# EAGLE board PCB_start v41 (EAGLE 9.7.0)
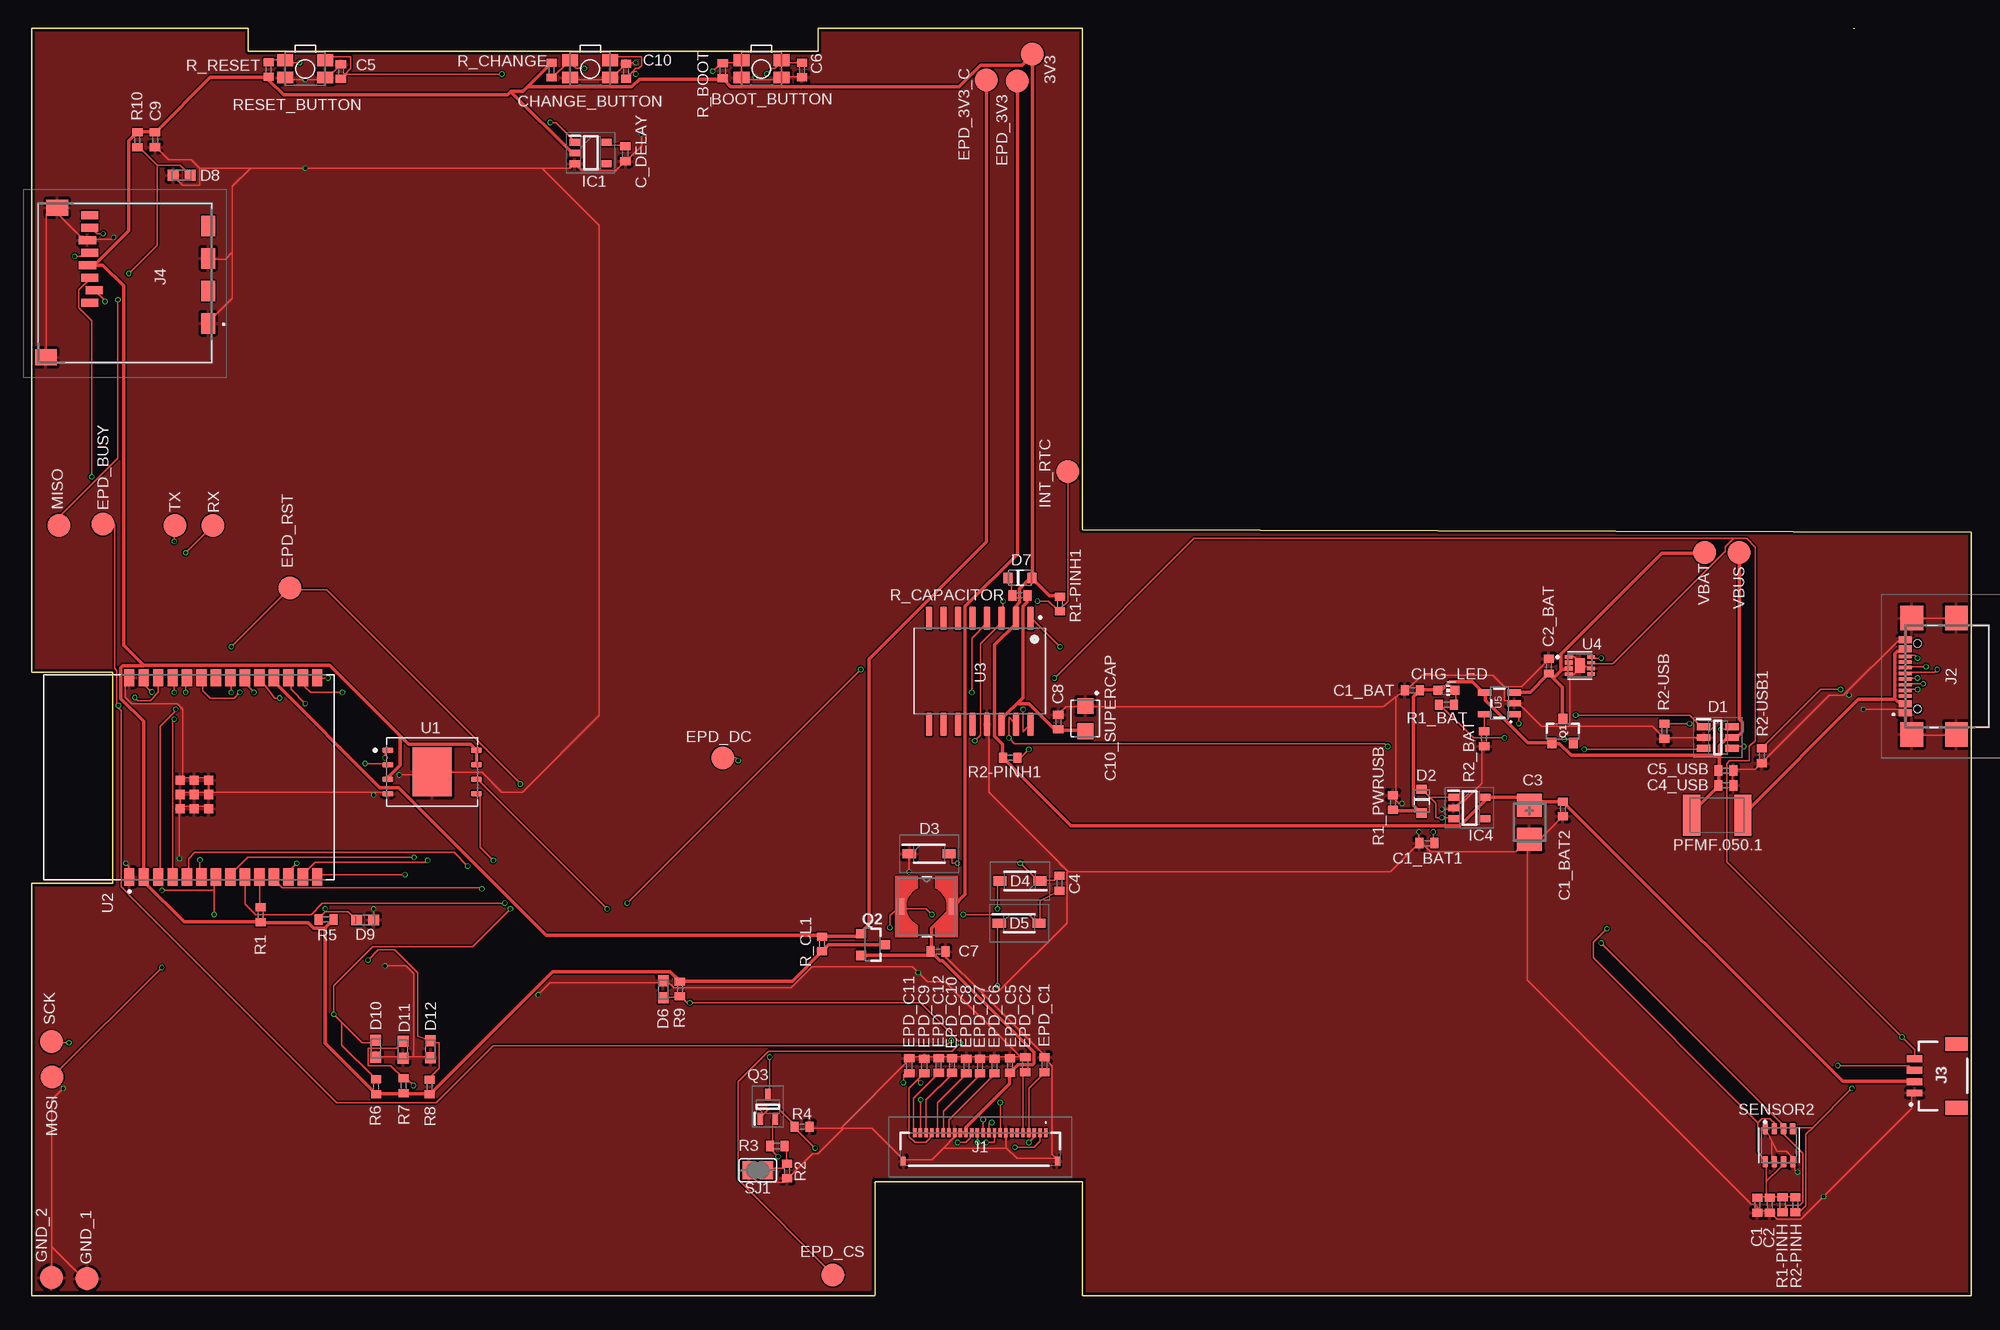
[diagram p0: board, top side]
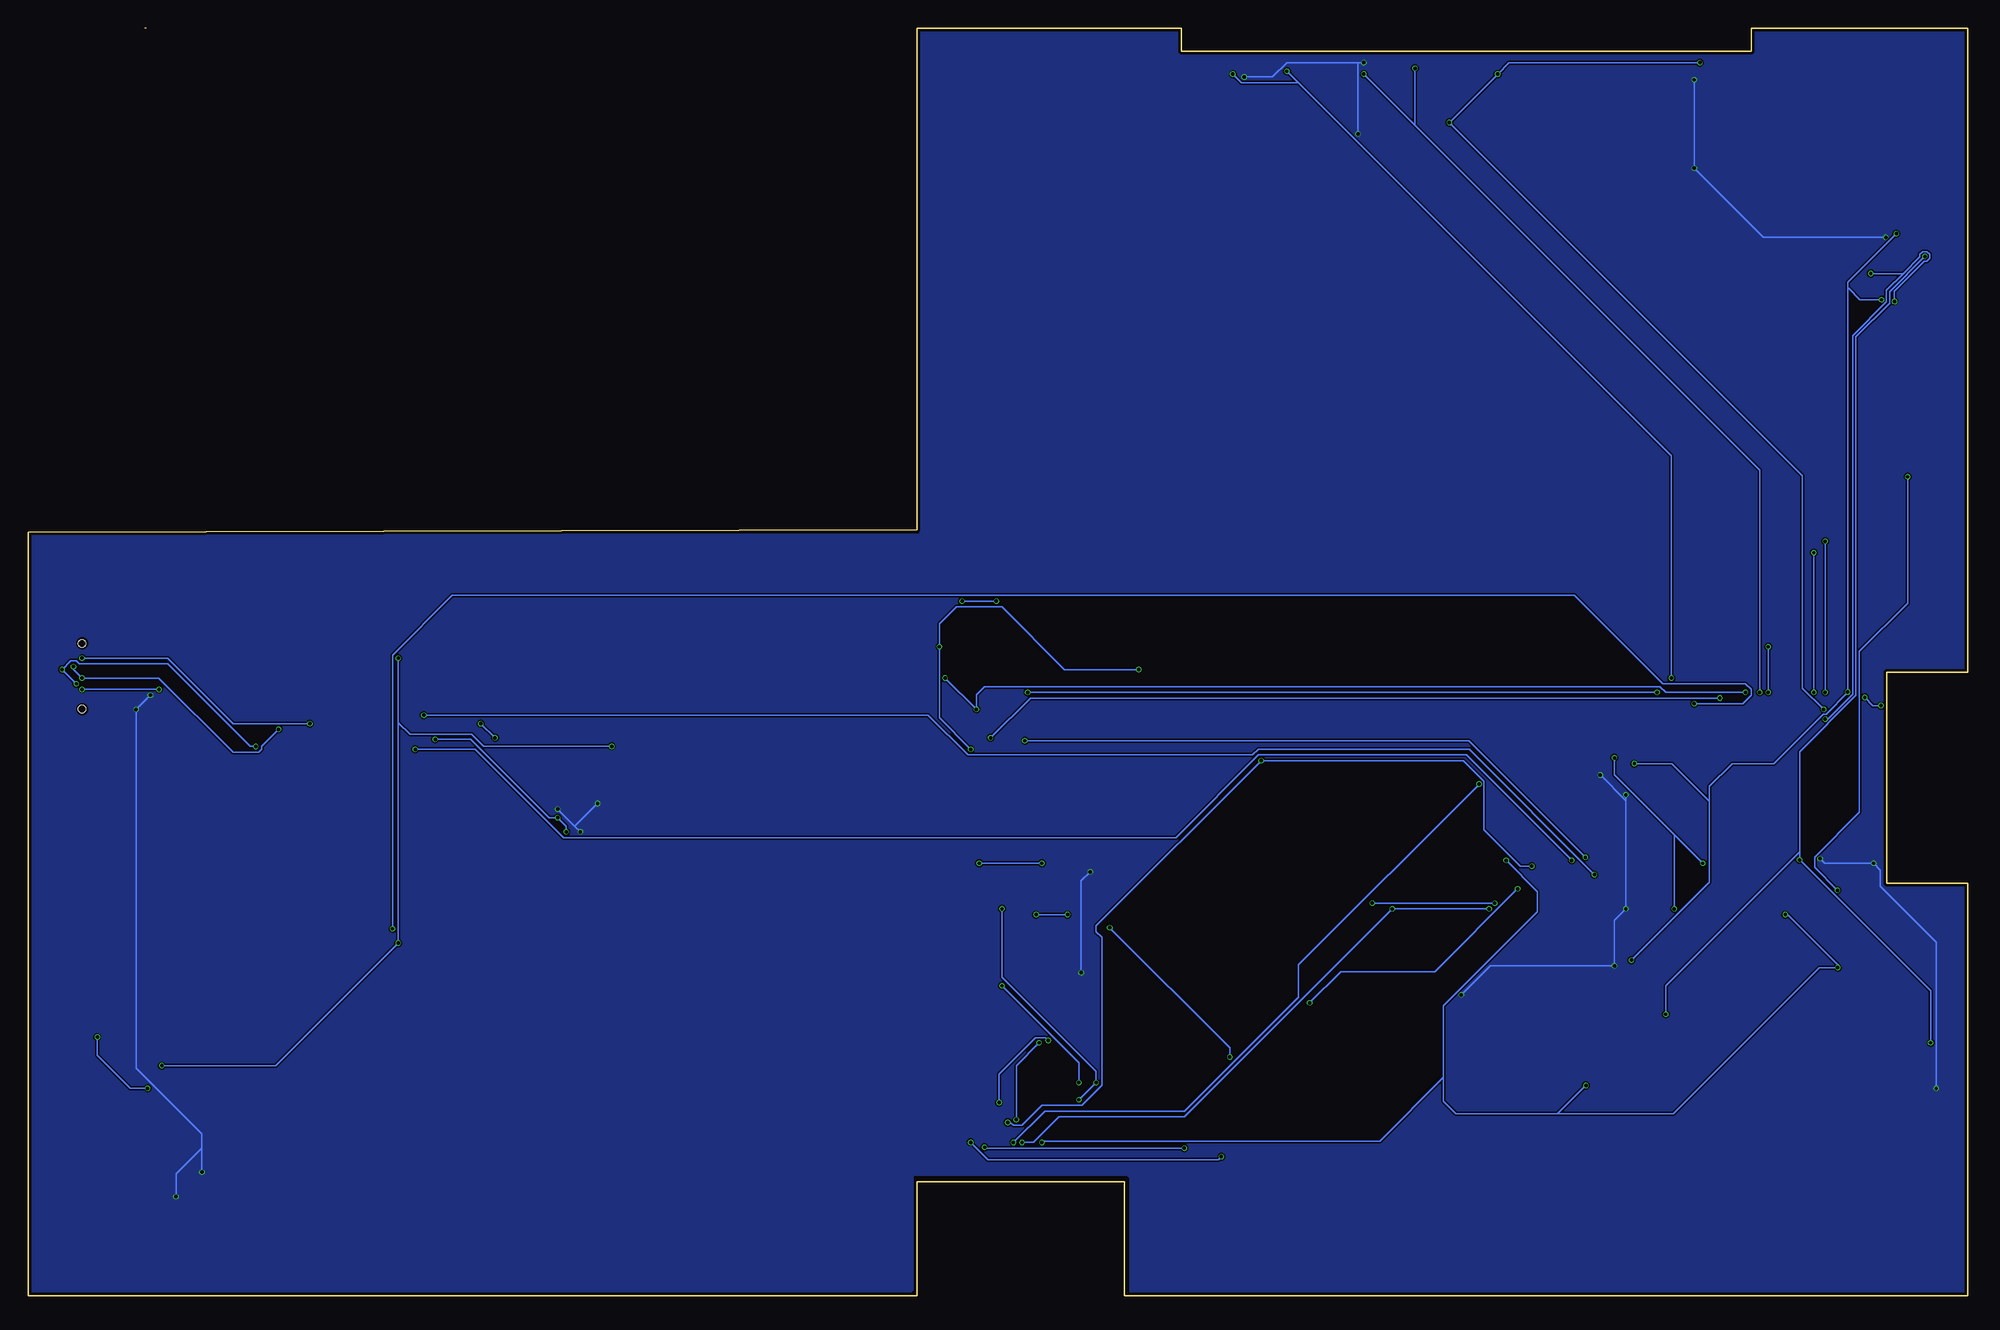
[diagram p1: board, bottom side, seen from below]

Size 170.2 x 111.2 mm. Coordinates in mm from the lower left corner, seen from the top.
Outline: 159.85,111.2 160,111.2
Outline: 170.2,0 92.2,0 92.2,10 74,10 74,0 0,0 0,36.2 7.1,36.2 7.1,49.14 7.1,54.7 0,54.7 0,111.2 19,111.2 19,109.2 69,109.2 69,111.2 92.2,111.2 92.2,67.2 170.2,67 170.2,0
Copper layers (1*16): Top 0.035mm / dielectric 1.6mm / Bottom 0.035mm
Design rules "jlcpcb-2layers.dru": minimum track width 0.15mm, minimum drill 0.3mm, track to track 5mil, track to pad 5mil, pad to pad 5mil, via to via 5mil, smd to smd 5mil, copper to edge 0.2mm, drill to drill 6mil, minimum pad ring 10mil, minimum via ring 3mil, stop-mask expansion 4mil, vias tented up to drill 0mil, thermal gap 10mil
Net classes: 1 POWER: width 0.3 mm

## Footprints (pad centres in the part's own frame; a part is rotated, then mirrored left to right if it is on the bottom)
TP20R = smd 2 x 2: TP 0,0
MYBUTTON = smd 1.4 x 1.05: 1 1.75,0.75; 2 -1.75,0.75; 3 -1.75,-0.75; 4 1.75,-0.75
ESP32_WROVER_EAGLE-LTSPICE_C0402 = smd 0.7 x 0.9: 1 -0.65,0; 2 0.65,0
EAGLE-LTSPICE_C0402 = smd 0.7 x 0.9: 1 -0.65,0; 2 0.65,0
RCL_CT3528 = smd 2 x 2.2: + -1.5,0; - 1.5,0
CAPCP3225X100N = smd 1.4 x 1.4: 1 -1.1,0; 2 1.1,0
ADAFRUIT_CHIP-LED0603 = smd 0.8 x 0.8: A 0,-0.75; C 0,0.75
SOT95P280X145-6N = smd 1.2 x 0.6: 1 -1.25,0.95; 2 -1.25,0; 3 -1.25,-0.95; 4 1.25,-0.95; 5 1.25,0; 6 1.25,0.95
ESP32_WROVER_AVX---SD0805S020S1R0_AVX_SD0805S020S1R0_0 = smd 0.8 x 0.9: 1 -1.05,0; 2 1.05,0
SOD3716X135N = smd 1.15 x 0.8: 1 -1.75,0; 2 1.75,0
DIOC1608X36N = smd 0.97 x 0.94: 1 -0.75,0; 2 0.75,0
SOT95P280X125-5N = smd 0.9 x 0.6: 1 -1.4,0.95; 2 -1.4,0; 3 -1.4,-0.95; 4 1.4,-0.95; 5 1.4,0.95
SOT95P280X120-5N = smd 0.9 x 0.6: 1 -1.4,0.95; 2 -1.4,0; 3 -1.4,-0.95; 4 1.4,-0.95; 5 1.4,0.95
FH34SRJ24S05SH99 = smd 0.3 x 0.8: 1 5.75,1.45; 2 5.25,1.45; 3 4.75,1.45; 4 4.25,1.45; 5 3.75,1.45; 6 3.25,1.45; 7 2.75,1.45; 8 2.25,1.45; 9 1.75,1.45; 10 1.25,1.45; 11 0.75,1.45; 12 0.25,1.45; 13 -0.25,1.45; 14 -0.75,1.45; 15 -1.25,1.45; 16 -1.75,1.45; 17 -2.25,1.45; 18 -2.75,1.45; 19 -3.25,1.45; 20 -3.75,1.45; 21 -4.25,1.45; 22 -4.75,1.45; 23 -5.25,1.45; 24 -5.75,1.45 | smd 0.4 x 0.8: MP1 6.75,-1.05; MP2 -6.75,-1.05
SAMACSYS_PARTS_USB4110GFA = smd 0.3 x 1.15: A1 -3.35,3.678; A4 -2.55,3.678; A5 -1.25,3.678; A6 -0.25,3.678; A7 0.25,3.678; A8 1.25,3.678; A9 2.55,3.678; A12 3.35,3.678; B1 3.05,3.678; B4 2.25,3.678; B5 1.75,3.678; B6 0.75,3.678; B7 -0.75,3.678; B8 -1.75,3.678; B9 -2.25,3.678; B12 -3.05,3.678 | smd 2.18 x 2: MP1 -5.11,-0.827; MP2 5.11,-0.827; MP3 -5.11,3.103; MP4 5.11,3.103 | hole 0.65: -2.89,2.603; 2.89,2.603
JST04_1MM_RA = smd 0.6 x 1.35: 1 -1.5,0; 2 -0.5,0; 3 0.5,0; 4 1.5,0 | smd 1.2 x 2: NC1 2.8,-3.675; NC2 -2.8,-3.675
112ATAARR03ATTEND = smd 1.8 x 1.2: G1 10.6,10.4; G2 4.9,10.4; S1 7.75,10.4; S2 2.05,10.4 | smd 1.4 x 1.9: G3 13.6,-3.85; G4 0.45,-2.85 | smd 0.7 x 1.5: P1 8.8,0; P2 7.7,0.4; P3 6.6,0; P4 5.5,-0.2; P5 4.4,0; P6 3.3,-0.2; P7 2.2,0; P8 1.1,0
IND_4828-WE-TPC_WRE = smd 0.711 x 1.422: 1 -2.286,0; 2 2.286,0
ESP32C6_VARISTOR_CT/CN1812 = smd 1.5 x 3.6: 1 -2.25,0; 2 2.25,0
ESP32_WROVER_SPARKFUN-DISCRETESEMI_SOT23-3 = smd 0.8 x 0.9: 1 -0.95,-1; 2 0.95,-1; 3 0,1.1
SOT65P210X110-3N = smd 1.05 x 0.5: 1 -1.05,0.65; 2 -1.05,-0.65; 3 1.05,0
ESP32_WROVER_EAGLE-LTSPICE_R0402 = smd 0.7 x 0.9: 1 -0.65,0; 2 0.65,0
ESP32_WROVER_BME680_PSON80P300X300X100-8N = smd 1.016 x 0.5: 1 1.458,1.2; 2 1.458,0.4; 3 1.458,-0.4; 4 1.458,-1.2; 5 -1.458,-1.22; 6 -1.458,-0.4; 7 -1.458,0.4; 8 -1.458,1.2
SJ = smd 1.168 x 1.6: 1 -0.762,0; 2 0.762,0
SON127P600X800X80-9N = smd 0.94 x 0.44: 1 -3.895,1.905; 2 -3.895,0.635; 3 -3.895,-0.635; 4 -3.895,-1.905; 5 3.895,-1.905; 6 3.895,-0.635; 7 3.895,0.635; 8 3.895,1.905 | smd 3.4 x 4.3: 9 0,0
XCVR_ESP32-C6-WROOM-1-N8 = smd 1.5 x 0.9: 1 -8.75,5.26; 2 -8.75,3.99; 3 -8.75,2.72; 4 -8.75,1.45; 5 -8.75,0.18; 6 -8.75,-1.09; 7 -8.75,-2.36; 8 -8.75,-3.63; 9 -8.75,-4.9; 10 -8.75,-6.17; 11 -8.75,-7.44; 12 -8.75,-8.71; 13 -8.75,-9.98; 14 -8.75,-11.25; 15 8.75,-11.25; 16 8.75,-9.98; 17 8.75,-8.71; 18 8.75,-7.44; 19 8.75,-6.17; 20 8.75,-4.9; 21 8.75,-3.63; 22 8.75,-2.36; 23 8.75,-1.09; 24 8.75,0.18; 25 8.75,1.45; 26 8.75,2.72; 27 8.75,3.99; 28 8.75,5.26 | smd 0.8 x 0.8: 29_1 -2.755,0.79; 29_2 -1.505,0.79; 29_3 -0.255,0.79; 29_4 -2.755,-0.46; 29_5 -1.505,-0.46; 29_6 -0.255,-0.46; 29_7 -2.755,-1.71; 29_8 -1.505,-1.71; 29_9 -0.255,-1.71
SOIC127P1032X265-16N = smd 2.05 x 0.59: 1 -4.655,4.445; 2 -4.655,3.175; 3 -4.655,1.905; 4 -4.655,0.635; 5 -4.655,-0.635; 6 -4.655,-1.905; 7 -4.655,-3.175; 8 -4.655,-4.445; 9 4.655,-4.445; 10 4.655,-3.175; 11 4.655,-1.905; 12 4.655,-0.635; 13 4.655,0.635; 14 4.655,1.905; 15 4.655,3.175; 16 4.655,4.445
SON50P200X200X80-9N = smd 0.76 x 0.27: 1 -0.985,0.75; 4 -0.985,-0.75; 5 0.985,-0.75; 6 0.985,-0.25; 7 0.985,0.25; 8 0.985,0.75 | smd 0.813 x 0.406: 2 -0.985,0.25; 3 -0.985,-0.25 | smd 0.9 x 1.3: 9 0,0
ESP32_WROVER_SPARKFUN-IC-POWER_SOT23-5 = smd 0.55 x 1.2: 1 -0.95,-1.3; 2 0,-1.3; 3 0.95,-1.3; 4 0.95,1.3; 5 -0.95,1.3

## Placement (x,y rotation side)
3V3  TPTP20R  [TP20R]  87.82,108.95 270 top
BOOT_BUTTON  BUTTON_CUSYOMV1"  [MYBUTTON]  64.03,107.65 180 top
C1  100nF  [ESP32_WROVER_EAGLE-LTSPICE_C0402]  151.45,7.94 270 top
C1_BAT  4.7uF  [ESP32_WROVER_EAGLE-LTSPICE_C0402]  121.16,53.14 180 top
C1_BAT1  4.7uF  [EAGLE-LTSPICE_C0402]  122.45,39.72 180 top
C1_BAT2  4.7uF  [EAGLE-LTSPICE_C0402]  134.38,42.71 270 top
C2  100nF  [ESP32_WROVER_EAGLE-LTSPICE_C0402]  152.53,7.94 270 top
C2_BAT  4.7uF  [ESP32_WROVER_EAGLE-LTSPICE_C0402]  133.14,55.25 90 top
C3  100uF TANT  [RCL_CT3528]  131.44,41.55 270 top
C4  4.7uF/25V  [ESP32_WROVER_EAGLE-LTSPICE_C0402]  90.19,36.2 270 top
C4_USB  100Nf  [ESP32_WROVER_EAGLE-LTSPICE_C0402]  148.67,44.78 0 top
C5  1uF  [ESP32_WROVER_EAGLE-LTSPICE_C0402]  27.13,107.42 90 top
C5_USB  4.7uF  [ESP32_WROVER_EAGLE-LTSPICE_C0402]  148.68,46.08 0 top
C6  100nF  [ESP32_WROVER_EAGLE-LTSPICE_C0402]  67.59,107.56 270 top
C7  10uF  [ESP32_WROVER_EAGLE-LTSPICE_C0402]  79.54,30.2 0 top
C8  100nF  [ESP32_WROVER_EAGLE-LTSPICE_C0402]  90.09,50.34 90 top
C9  100nF  [EAGLE-LTSPICE_C0402]  10.81,101.43 270 top
C10  100nF  [ESP32_WROVER_EAGLE-LTSPICE_C0402]  52.15,107.44 90 top
C10_SUPERCAP  CPH3225A"  [CAPCP3225X100N]  92.46,50.65 270 top
C_DELAY  100nF  [ESP32_WROVER_EAGLE-LTSPICE_C0402]  52.09,100.2 270 top
CHANGE_BUTTON  BUTTON_CUSYOMV1"  [MYBUTTON]  49,107.65 180 top
CHG_LED  [ADAFRUIT_CHIP-LED0603]  124.15,53.12 270 top
D1  USBLC6-2SC6Y"  [SOT95P280X145-6N]  147.98,48.98 0 top
D2  ESP32_WROVER_AVX---SD0805S020S1R0_AVX_SD0805S020S1R0_0_0AVX_SD0805S020S1R0_0_0  [ESP32_WROVER_AVX---SD0805S020S1R0_AVX_SD0805S020S1R0_0]  121.99,43.41 270 top
D3  MBR0530"  [SOD3716X135N]  78.76,38.78 0 top
D4  MBR0530"  [SOD3716X135N]  86.72,36.39 180 top
D5  MBR0530"  [SOD3716X135N]  86.66,32.69 0 top
D6  PGB1010603MR"  [DIOC1608X36N]  55.42,26.88 90 top
D7  ESP32_WROVER_AVX---SD0805S020S1R0_AVX_SD0805S020S1R0_0_0AVX_SD0805S020S1R0_0_0  [ESP32_WROVER_AVX---SD0805S020S1R0_AVX_SD0805S020S1R0_0]  86.74,62.99 0 top
D8  PGB1010603MR"  [DIOC1608X36N]  13.14,98.32 180 top
D9  PGB1010603MR"  [DIOC1608X36N]  29.24,32.98 0 top
D10  PGB1010603MR"  [DIOC1608X36N]  30.18,21.68 270 top
D11  PGB1010603MR"  [DIOC1608X36N]  32.58,21.6 270 top
D12  PGB1010603MR"  [DIOC1608X36N]  34.98,21.62 270 top
EPD_3V3  TPTP20R  [TP20R]  86.5,106.61 270 top
EPD_3V3_C  TPTP20R  [TP20R]  83.77,106.7 270 top
EPD_BUSY  TPTP20R  [TP20R]  6.22,67.7 0 top
EPD_C1  1uF/50V  [ESP32_WROVER_EAGLE-LTSPICE_C0402]  88.88,20.26 90 top
EPD_C2  1uF/50V  [ESP32_WROVER_EAGLE-LTSPICE_C0402]  87.19,20.26 90 top
EPD_C5  0.1uF/50V  [ESP32_WROVER_EAGLE-LTSPICE_C0402]  85.85,20.2 90 top
EPD_C6  1uF/50V  [ESP32_WROVER_EAGLE-LTSPICE_C0402]  84.5,20.16 90 top
EPD_C7  1uF/50V  [ESP32_WROVER_EAGLE-LTSPICE_C0402]  83.21,20.16 90 top
EPD_C8  1uF/50V  [ESP32_WROVER_EAGLE-LTSPICE_C0402]  82.02,20.16 90 top
EPD_C9  1uF/50V  [ESP32_WROVER_EAGLE-LTSPICE_C0402]  78.33,20.16 90 top
EPD_C10  1uF/50V  [ESP32_WROVER_EAGLE-LTSPICE_C0402]  80.75,20.2 90 top
EPD_C11  1uF/50V  [ESP32_WROVER_EAGLE-LTSPICE_C0402]  77.01,20.18 90 top
EPD_C12  1uF/50V  [ESP32_WROVER_EAGLE-LTSPICE_C0402]  79.59,20.2 90 top
EPD_CS  TPTP20R  [TP20R]  70.3,1.82 0 top
EPD_DC  TPTP20R  [TP20R]  60.64,47.2 0 top
EPD_RST  TPTP20R  [TP20R]  22.65,62.12 0 top
GND_1  TPTP20R  [TP20R]  4.84,1.5 0 top
GND_2  TPTP20R  [TP20R]  1.72,1.6 0 top
IC1  BD5229G-TR"  [SOT95P280X125-5N]  49.05,100.28 0 top
IC4  XC6220A331MR-G"  [SOT95P280X120-5N]  126.18,42.8 0 top
INT_RTC  TPTP20R  [TP20R]  90.92,72.32 0 top
J1  FH34SRJ-24S-0.5SH_99_"  [FH34SRJ24S05SH99]  83.24,12.85 0 top
J2  SAMACSYS_PARTS_USB4110-GF-ACU3D  [SAMACSYS_PARTS_USB4110GFA]  168.1,54.36 90 top
J3  QWIIC_RIGHT_ANGLE  [JST04_1MM_RA]  165.25,19.29 90 top
J4  112A-TAAR-R03_ATTEND"  [112ATAARR03ATTEND]  5.08,95.93 270 top
L1  744043680IND_4828-WE-TPC_WRE  [IND_4828-WE-TPC_WRE]  78.53,34.15 0 top
MISO  TPTP20R  [TP20R]  2.38,67.6 0 top
MOSI  TPTP20R  [TP20R]  1.78,19.2 0 top
PFMF.050.1  ESP32C6_VARISTORCN1812  [ESP32C6_VARISTOR_CT/CN1812]  147.92,42.16 180 top
Q1  20V/4.2A/52mΩ/1.4W  [ESP32_WROVER_SPARKFUN-DISCRETESEMI_SOT23-3]  134.36,49.51 0 top
Q2  20V/4.2A/52mΩ/1.4W  [ESP32_WROVER_SPARKFUN-DISCRETESEMI_SOT23-3]  73.78,30.81 270 top
Q3  SI1308EDL-T1-GE3""  [SOT65P210X110-3N]  64.59,16.59 90 top
R1  10K  [ESP32_WROVER_EAGLE-LTSPICE_R0402]  20.09,33.42 90 top
R1-PINH  10K  [ESP32_WROVER_EAGLE-LTSPICE_R0402]  153.66,7.98 90 top
R1-PINH1  10K  [ESP32_WROVER_EAGLE-LTSPICE_R0402]  90.23,60.7 90 top
R1_BAT  200  [ESP32_WROVER_EAGLE-LTSPICE_R0402]  124.16,51.86 0 top
R1_PWRUSB  100K  [ESP32_WROVER_EAGLE-LTSPICE_R0402]  119.45,43.28 270 top
R2  2.2  [ESP32_WROVER_EAGLE-LTSPICE_R0402]  66.28,10.95 90 top
R2-PINH  10K  [ESP32_WROVER_EAGLE-LTSPICE_R0402]  154.78,7.98 90 top
R2-PINH1  10K  [ESP32_WROVER_EAGLE-LTSPICE_R0402]  85.87,47.2 180 top
R2-USB  5k1  [ESP32_WROVER_EAGLE-LTSPICE_R0402]  143.29,49.54 270 top
R2-USB1  5k1  [ESP32_WROVER_EAGLE-LTSPICE_R0402]  151.83,47.38 90 top
R2_BAT  2K  [ESP32_WROVER_EAGLE-LTSPICE_R0402]  127.46,48.88 90 top
R3  0.47  [ESP32_WROVER_EAGLE-LTSPICE_R0402]  65.42,13.14 0 top
R4  10K  [ESP32_WROVER_EAGLE-LTSPICE_R0402]  67.61,14.82 0 top
R5  10K  [ESP32_WROVER_EAGLE-LTSPICE_R0402]  25.83,33.02 0 top
R6  10K  [ESP32_WROVER_EAGLE-LTSPICE_R0402]  30.22,18.35 270 top
R7  10K  [ESP32_WROVER_EAGLE-LTSPICE_R0402]  32.62,18.43 270 top
R8  10K  [ESP32_WROVER_EAGLE-LTSPICE_R0402]  34.92,18.31 270 top
R9  10K  [ESP32_WROVER_EAGLE-LTSPICE_R0402]  56.88,26.91 90 top
R10  10K  [ESP32_WROVER_EAGLE-LTSPICE_R0402]  9.26,101.44 90 top
R_BOOT  10K  [ESP32_WROVER_EAGLE-LTSPICE_R0402]  60.64,107.48 90 top
R_CAPACITOR  15  [ESP32_WROVER_EAGLE-LTSPICE_R0402]  86.72,61.45 0 top
R_CHANGE  10K  [ESP32_WROVER_EAGLE-LTSPICE_R0402]  45.61,107.55 270 top
R_CL1  10K  [ESP32_WROVER_EAGLE-LTSPICE_R0402]  69.36,30.87 90 top
R_RESET  10K  [ESP32_WROVER_EAGLE-LTSPICE_R0402]  20.79,107.6 90 top
RESET_BUTTON  BUTTON_CUSYOMV1"  [MYBUTTON]  23.99,107.65 180 top
RX  TPTP20R  [TP20R]  15.88,67.6 0 top
SCK  TPTP20R  [TP20R]  1.7,22.3 0 top
SENSOR2  ESP32_WROVER_BME680_BME680"  [ESP32_WROVER_BME680_PSON80P300X300X100-8N]  153.34,13.2 90 top
SJ1  [SJ]  63.71,11 0 top
TX  TPTP20R  [TP20R]  12.56,67.6 0 top
U1  W25Q512JVEIQ"  [SON127P600X800X80-9N]  35.13,45.96 0 top
U2  ESP32-C6-WROOM-1-N8"  [XCVR_ESP32-C6-WROOM-1-N8]  13.8,45.49 90 top
U3  DS3231SN#"  [SOIC127P1032X265-16N]  83.19,54.8 270 top
U4  MAX17048G+T10  [SON50P200X200X80-9N]  135.87,55.3 0 top
U5  ESP32_WROVER_SPARKFUN-IC-POWER_MCP73831"  [ESP32_WROVER_SPARKFUN-IC-POWER_SOT23-5]  128.8,51.98 90 top
VBAT  TPTP20R  [TP20R]  146.8,65.2 0 top
VBUS  TPTP20R  [TP20R]  149.85,65.22 0 top

## Library data of the parts
3V3 BOOT_BUTTON C1 C1_BAT C1_BAT1 C1_BAT2 C2 C2_BAT C3 C4 C4_USB C5 C5_USB C6-C10 C10_SUPERCAP C_DELAY CHANGE_BUTTON CHG_LED D1-D12 EPD_3V3 EPD_3V3_C EPD_BUSY EPD_C1 EPD_C2 EPD_C5-EPD_C12 EPD_CS EPD_DC EPD_RST GND_1 GND_2 IC1 IC4 INT_RTC J1-J4 MISO MOSI PFMF.050.1 Q1-Q3 R1 R1-PINH R1-PINH1 R1_BAT R1_PWRUSB R2 R2-PINH R2-PINH1 R2-USB R2-USB1 R2_BAT R3-R10 R_BOOT R_CAPACITOR R_CHANGE R_CL1 R_RESET RESET_BUTTON RX SCK SENSOR2 SJ1 TX U1-U5 VBAT VBUS = DeskAssistant v19 v1
L1 = DeskAssistant v19 v1; VAL: 68uH

## Nets
3V3 [POWER]: 3V3.TP C1_BAT2.1 C3.+ C9.1 D7.2 IC1.2 IC4.5 J3.2 J4.P4 Q2.3 R1-PINH1.2 R1.1 R2-PINH1.2 R5.2 R6.2 R7.2 R8.2 R9.2 R10.2 R_BOOT.1 R_CHANGE.1 R_CL1.1 R_RESET.1 U1.3 U1.7 U1.8 U2.2 U3.2
32KHZ: R2-PINH1.1 U2.9 U3.1
DN: D1.4 J2.A7 J2.B7
DP: D1.6 J2.A6 J2.B6
EPD_3V3 [POWER]: C7.1 EPD_3V3.TP EPD_C5.1 J1.15 J1.16 L1.2 Q2.2
EPD_3V3_C [POWER]: EPD_3V3_C.TP Q2.1 R_CL1.2 U2.18
EPD_BUSY: EPD_BUSY.TP J1.9 U2.26
EPD_CS: D6.1 EPD_CS.TP J1.12 R9.1 U2.11
EPD_DC: EPD_DC.TP J1.11 U2.5
EPD_RST: EPD_RST.TP J1.10 U2.21
FLASH_CS: D9.1 R5.1 U1.1 U2.12
GDR: J1.2 Q3.1 R4.1
GND: BOOT_BUTTON.1 BOOT_BUTTON.2 C1.2 C1_BAT1.2 C1_BAT2.2 C1_BAT.2 C2.2 C2_BAT.2 C3.- C4_USB.2 C5.2 C5_USB.2 C6.2 C7.2 C8.2 C9.2 C10.2 C10_SUPERCAP.1 C_DELAY.2 CHANGE_BUTTON.1 CHANGE_BUTTON.2 D1.2 D3.1 D6.2 D8.2 D9.2 D10.2 D11.2 D12.2 EPD_C1.2 EPD_C2.2 EPD_C5.2 EPD_C6.2 EPD_C7.2 EPD_C8.2 EPD_C9.2 EPD_C10.2 EPD_C11.2 EPD_C12.2 GND_1.TP GND_2.TP IC1.3 IC4.2 J1.8 J1.17 J1.MP1 J1.MP2 J2.A1 J2.A12 J2.B1 J2.B12 J2.MP1 J2.MP2 J2.MP3 J2.MP4 J3.1 J4.G1 J4.G2 J4.G3 J4.G4 J4.P6 R1_PWRUSB.1 R2-USB1.1 R2-USB.2 R2.1 R2_BAT.1 R4.2 RESET_BUTTON.1 RESET_BUTTON.2 SENSOR2.1 SENSOR2.5 SENSOR2.7 SJ1.1 U1.4 U1.9 U2.1 U2.28 U2.29_1 U2.29_2 U2.29_3 U2.29_4 U2.29_5 U2.29_6 U2.29_7 U2.29_8 U2.29_9 U3.13 U4.1 U4.4 U4.6 U4.9 U5.2
GPIO8: R1.2 U2.10
I2C_PW: C1.1 C2.1 R1-PINH.2 R2-PINH.2 SENSOR2.2 SENSOR2.6 SENSOR2.8 U2.17
INT_RTC: INT_RTC.TP R1-PINH1.1 U2.8 U3.3
IO/BOOT: BOOT_BUTTON.3 BOOT_BUTTON.4 C6.1 R_BOOT.2 U2.15
IO/CHANGE: C10.1 CHANGE_BUTTON.3 CHANGE_BUTTON.4 R_CHANGE.2 U2.23
MISO: D12.1 J4.P7 MISO.TP R8.1 U1.2 U2.27
MOSI: D11.1 J1.14 J4.P3 MOSI.TP R7.1 U1.5 U2.7
N$1: C1_BAT1.1 D2.1 IC4.1 IC4.3 Q1.2
N$2: C_DELAY.1 IC1.5
N$3: J2.B5 R2-USB.1
N$4: J2.A5 R2-USB1.2
N$5: R1_BAT.1 U5.1
N$6: CHG_LED.C R1_BAT.2
N$7: C4.1 D3.2 D4.1
N$9: R2_BAT.2 U5.5
N$10: EPD_C1.1 J1.4
N$11: EPD_C2.1 J1.5
N$18: D7.1 R_CAPACITOR.1
N$19: EPD_C6.1 J1.18
N$20: EPD_C7.1 J1.19
N$21: EPD_C8.1 J1.20
N$23: EPD_C10.1 J1.22
N$25: EPD_C12.1 J1.24
PREVGH: D5.1 EPD_C9.1 J1.21
PREVGL: D4.2 EPD_C11.1 J1.23
RESE: J1.3 Q3.2 R3.1
RESE': R2.2 R3.2 SJ1.2
RESET: C5.1 IC1.1 R_RESET.2 RESET_BUTTON.3 RESET_BUTTON.4 U2.3
RTC_RST: U2.16 U3.4
RX: RX.TP U2.24
SCK: D10.1 J1.13 J4.P5 R6.1 SCK.TP U1.6 U2.6
SCL: J3.4 R2-PINH.1 SENSOR2.4 U2.20 U3.16 U4.7
SDA: J3.3 R1-PINH.1 SENSOR2.3 U2.19 U3.15 U4.8
SRC: C4.2 D5.2 L1.1 Q3.3
SS_SD: D8.1 J4.P2 R10.1 U2.4
TX: TX.TP U2.25
USB_D+: D1.1 U2.14
USB_D-: D1.3 U2.13
VBAT [POWER]: C2_BAT.1 Q1.3 U4.2 U4.3 U5.3 VBAT.TP
VBUS [POWER]: C1_BAT.1 C4_USB.1 C5_USB.1 CHG_LED.A D1.5 D2.2 PFMF.050.1.2 Q1.1 R1_PWRUSB.2 U5.4 VBUS.TP
VRTC [POWER]: C8.1 C10_SUPERCAP.2 R_CAPACITOR.2 U3.14
VUSB [POWER]: J2.A4 J2.A9 J2.B4 J2.B9 PFMF.050.1.1

## Tracks (layer width: path | path; a pad name or v marks a point on that pad's centre or on a via)
3V3
  Top 0.3: Q2.3 74.86,30.8 69.94,30.8 69.46,30.31 R_CL1.1 69.32,30.17 66.76,27.61 56.92,27.61 R9.2 56.78,27.68 56.02,28.44 45.7,28.44 35.04,17.78 R8.2 34.9,17.71 32.76,17.71 R7.2 32.55,17.71 30.26,17.71 R6.2 30.12,17.78 25.76,22.14 25.76,32.11 25.69,32.25 | 32.3,49.13 32.3,46.55 31.3,45.55 31.3,45.34 U1.3 | U1.7 39.06,46.66 39.06,47.76 U1.8 38.99,47.9 38.5,48.39 33.05,48.39 32.3,49.13 | 25.69,32.25 24.72,32.25 24.24,32.74 20.15,32.74 R1.1 19.94,32.81 13.37,32.81 9.83,36.34 9.83,36.68 U2.2 9.83,36.89 9.83,37.1 9.81,37.12 9.81,50.39 7.81,52.39 7.81,55.11 7.97,55.27 9.77,55.27 9.81,55.31 | 25.69,32.25 26.45,33.01 R5.2 | 32.3,49.13 26.12,55.31 9.81,55.31 | J3.2 165.23,18.82 158.93,18.82 134.48,43.26 C1_BAT2.1 134.34,43.33 131.78,43.33 131.57,43.12 C3.+ 130.74,43.75 127.63,43.75 IC4.5 127.56,43.61 127.56,43.47 125.34,41.25 91.2,41.25 85.32,47.14 R2-PINH1.2 85.18,47.21 85.18,48.39 84.48,49.08 84.48,57.11 86.36,58.98 86.36,59.4 U3.2 86.36,59.61 86.36,60.51 86.7,60.85 86.7,62.03 87.53,62.86 87.67,62.86 D7.2 | R1-PINH1.2 90.16,61.41 89.33,61.41 87.81,62.93 D7.2 | 43.49,106.07 45.57,108.15 R_CHANGE.1 | 42.07,105.67 42.07,105.62 47.37,100.33 47.64,100.33 IC1.2 | 43.49,106.07 52.63,106.07 53.32,106.77 60.59,106.77 R_BOOT.1 60.73,106.7 61.33,106.1 81.36,106.1 83.24,107.98 86.91,107.98 87.81,108.88 | 3V3.TP 87.81,108.97 87.81,108.88 | 87.81,108.88 87.81,63.14 D7.2 | 9.81,55.31 8.05,57.07 8.05,88.6 6.23,90.43 J4.P4 4.92,90.49 5.54,90.49 8.52,93.47 8.52,101.36 9.14,101.99 R10.2 9.28,102.12 10.8,102.12 C9.1 10.94,102.2 15.65,106.9 20.77,106.9 R_RESET.1 20.84,106.77 20.84,106.63 22.1,105.37 41.77,105.37 42.07,105.67
  Top 0.3: 43.49,106.07 43.12,105.7 42.1,105.7 42.07,105.67
32KHZ  (via drill 0.3)
  Top 0.15: v87.5,47.95 86.75,47.2 R2-PINH1.1 | v90.25,56.95 87.75,59.45 U3.1 | v41.5,34.45 25.5,34.45 24.5,33.45 19.62,33.45 18.7,34.37 U2.9 | v52.25,34.45 v72.75,54.95
  Bottom 0.15: v87.5,47.95 90.25,50.7 v90.25,56.95 90.25,58.95 88.75,60.45 84.75,60.45 79.25,54.95 v72.75,54.95 | v52.25,34.45 v41.5,34.45
DN  (via drill 0.3)
  Top 0.15: v166,53.7 164.5,53.7 J2.B7 | v167.25,54.95 167,54.7 164.5,54.7 J2.A7 | v150.25,48.2 149.25,48.2 D1.4
  Bottom 0.15: v166,53.7 v167.25,54.95 166.5,55.7 166,55.7 165.75,55.45 158,55.45 150.75,48.2 v150.25,48.2
DP  (via drill 0.3)
  Top 0.15: v165.5,54.2 164.5,54.2 J2.A6 | v166.25,55.2 164.5,55.2 J2.B6 | v148.25,49.7 149,49.7 D1.6
  Bottom 0.15: v166.25,55.2 166.25,54.95 v165.5,54.2 158.75,54.2 152.25,47.7 150,47.7 149.75,47.95 149.75,48.2 v148.25,49.7
EPD_3V3
  Top 0.3: J1.16 81.51,14.32 81.92,14.32 J1.15 81.99,14.45 81.99,14.8 85.8,18.61 85.8,19.51 EPD_C5.1 85.94,19.65 86.56,20.27 87.81,20.27 87.95,20.41 87.95,21.38 79.92,29.41 79.71,29.41 79.01,30.11 C7.1 | Q2.2 72.78,29.9 78.6,29.9 78.88,30.17 C7.1 | EPD_3V3.TP 86.49,106.56 86.49,65.08 81.92,60.51 81.92,35.23 80.88,34.19 L1.2 80.75,34.05 78.94,32.25 78.94,30.31 C7.1
EPD_3V3_C
  Top 0.3: U2.18 21.26,54.2 21.26,53.86 30.54,44.58 32.2,44.58 45.15,31.63 69.25,31.63 R_CL1.2 69.39,31.56 72.57,31.56 72.71,31.7 Q2.1 72.78,31.91 73.47,32.6 73.47,55.87 83.77,66.17 EPD_3V3_C.TP
EPD_BUSY  (via drill 0.3)
  Top 0.15: v85,16.95 85,14.45 J1.9 | EPD_BUSY.TP 7.25,67.7 7.25,55.55 7.25,55.05 7.45,54.84 7.45,51.94 v7.6,51.79 | U2.26 11.1,54.22 11.1,52.94 10.38,52.23 9.3,52.23 v9.03,52.5 | v80.7,22.4 80.25,21.95 40.5,21.95 35.5,16.95 26.75,16.95 9.18,34.52
  Top 0.152: v7.6,51.79 7.6,51.56 7.82,51.34 7.82,35.88 9.18,34.52
  Bottom 0.15: v85,16.95 85,19.45 81.82,22.63 80.93,22.63 v80.7,22.4 | v9.03,52.5 8.32,51.79 v7.6,51.79
EPD_CS  (via drill 0.3)
  Top 0.15: v83.5,15.45 83.5,14.45 J1.12 | D6.1 55.5,26.2 56.75,26.2 R9.1 57,26.2 57.5,25.7 v57.75,25.7 78,25.7 v81.5,22.2 80.75,21.45 64.64,21.45 61.96,18.77 61.96,10.24 70.25,1.95 EPD_CS.TP | U2.11 21.25,36.7 21.25,36.51 21.98,35.79 39.41,35.79 v39.5,35.7
  Bottom 0.15: v83.5,15.45 83.5,20.2 v81.5,22.2 | v39.5,35.7 46.75,28.45 55,28.45 v57.75,25.7
EPD_DC  (via drill 0.3)
  Top 0.15: v84.25,15.2 84,15.2 84,14.45 J1.11 | v62,46.95 61.75,47.2 EPD_DC.TP | v38.25,37.7 37.05,38.9 14.3,38.9 13.75,38.35 13.75,36.95 U2.5
  Bottom 0.15: v84.25,15.2 84,15.2 83.75,14.95 83,14.95 81.25,16.7 77.75,16.7 76,18.45 76,31.45 76.5,31.95 76.5,32.45 v62,46.95 44.25,46.95 42.44,45.14 42.44,40.89 39.25,37.7 v38.25,37.7
EPD_RST  (via drill 0.3)
  Top 0.15: v83.75,13.45 84.5,13.45 84.5,14.2 J1.10 | v17.5,52.95 17.5,54.2 U2.21 | v17.5,56.95 22.5,61.95 EPD_RST.TP 22.75,61.95 25.88,61.95 42.87,44.96 v42.87,44.9
  Bottom 0.15: v83.75,13.45 81,16.2 68.75,16.2 58.75,26.2 58.75,29.02 v42.87,44.9 | v17.5,56.95 v17.5,52.95
FLASH_CS  (via drill 0.3)
  Top 0.15: 25.75,33.7 25.25,33.2 R5.1 | 25.75,33.7 27.75,33.7 28.25,33.2 D9.1 | v31,47.2 31,47.7 U1.1 | v23.25,37.95 22.75,37.45 22.75,36.95 U2.12 | v25.75,33.95 25.75,33.7
  Bottom 0.15: v31,47.2 31,45.7 25.75,40.45 | v23.25,37.95 25.75,40.45 | 25.75,40.45 v25.75,33.95
GDR  (via drill 0.3)
  Top 0.15: v68.75,12.95 67,14.7 R4.1 67,14.95 65.5,16.45 64.75,16.45 64,15.7 Q3.1 | J1.2 88.5,14.2 88.5,13.56 87.96,13.02 v86.28,13.02 v86.28,13.03
  Bottom 0.15: v68.75,12.95 86.2,12.95 v86.28,13.03
GND  (via drill 0.3)
  Top 0.15: C6.2 67.5,106.95 66,106.95 BOOT_BUTTON.2 65.75,106.7 63.5,106.7 | 63.5,106.7 62.5,106.7 BOOT_BUTTON.1 | CHANGE_BUTTON.1 47.25,106.7 50.75,106.7 CHANGE_BUTTON.2 50.75,106.95 51,106.95 52,107.95 C10.2 52.25,108.2 v53,108.2 | v63.5,106.95 63.5,106.7 | 2.25,94.95 4.25,92.95 4.5,92.95 4.75,92.7 J4.P6 4.94,92.7 7,92.7 v7.18,92.88 | 2.25,94.95 2.25,95.45 J4.G4 2.25,94.95 | 2.25,94.95 1.25,94.95 1.25,82.45 J4.G3 | 17.6,91.55 17.6,97.35 19.2,98.95 v24,98.95 | 17.6,91.55 17.6,87.55 15.5,85.45 J4.G1 | J4.G2 15.5,90.95 17,90.95 17.6,91.55 | C5.2 27,107.95 26,106.95 25.75,106.95 RESET_BUTTON.2 25.5,106.7 v24,106.7 22.25,106.7 RESET_BUTTON.1 | 14.75,98.95 14,99.7 12,99.7 11,100.7 C9.2 | 14.75,98.95 14.75,97.45 13.25,97.45 12.5,98.2 D8.2 | 14.75,98.95 v24,98.95 | v24,98.95 44.8,98.95 | 44.8,98.95 47.25,98.95 47.5,99.2 IC1.3 47.75,99.2 48.25,98.7 51.25,98.7 52,99.45 C_DELAY.2 53.5,100.87 v53.5,101.95 | 13.25,45.45 14.25,45.45 U2.29_6 14.5,45.45 15.5,45.45 U2.29_9 15.5,45.2 15.5,44.2 | U2.28 8.2,53.9 8.2,52.5 8.75,51.95 12.75,51.95 13.25,51.45 13.25,45.45 | 13.25,45.45 U2.29_3 | GND_1.TP 4.54,1.5 1.75,4.29 | GND_2.TP 1.75,1.45 1.75,4.29 | 33.5,20.95 34.75,20.95 D12.2 | 33.5,20.95 32.75,20.95 D11.2 32.5,20.95 30.25,20.95 D10.2 | U2.29_1 13,42.95 13,43.95 U2.29_2 13.25,44.2 14.25,44.2 U2.29_5 14.5,44.2 15.5,44.2 | U2.29_1 13.25,42.95 14.25,42.95 U2.29_4 14.5,42.95 15.5,42.95 U2.29_7 | 30,44.2 15.75,44.2 U2.29_8 15.5,44.2 | 30,44.2 31,44.2 U1.4 | v30,33.95 30,33.2 D9.2 | 30,44.2 v30,43.95 | v8.25,37.95 8.5,37.7 8.5,36.95 U2.1 | v12.95,38.35 12.95,42.7 13,42.7 U2.29_1 | v31,28.95 32.85,28.95 33.5,28.3 33.5,20.95
  Top 0.15: v2.75,18.2 1.75,17.2 1.75,4.29 | v32.25,45.7 34.75,45.7 35,45.95 U1.9 35.25,45.95 39.5,45.95 41.25,44.2 43.08,44.2 49.8,50.92 49.8,93.95 44.8,98.95 | D1.2 146.5,48.95 143.5,48.95 R2-USB.2 143.25,48.95 142.25,49.95 135,49.95 | 135,54.45 135.05,54.5 135.3,54.5 136,55.2 | 136,55.2 136.5,55.2 136.75,54.95 U4.6 | 136,55.2 U4.9 136,55.45 135.4,56.05 U4.1 | 129.25,53.45 130.75,53.45 133,55.7 C2_BAT.2 | 129.25,53.45 129.25,52.2 130,52.2 U5.2 130.25,51.95 130.5,51.95 132.5,49.95 135,49.95 | 135,49.95 135,54.45 | 135,54.45 U4.4 | C8.2 90.25,51.2 90.75,51.7 92.25,51.7 C10_SUPERCAP.1 92.5,51.7 118.6,51.7 118.66,51.75 119.69,52.52 | 119.69,52.52 C1_BAT.2 120.75,53.2 122,54.45 128.25,54.45 129.25,53.45 | 80.75,20.95 79.75,20.95 EPD_C12.2 79.5,20.95 78.5,20.95 EPD_C9.2 78.25,20.95 77.25,20.95 EPD_C11.2 77,20.7 71,14.7 | 84.5,20.95 83.25,20.95 EPD_C7.2 83,20.95 82.25,20.95 EPD_C8.2 82,20.95 80.75,20.95 | 86.75,20.95 87,20.95 EPD_C2.2 86.75,20.95 | 86.75,20.95 86,20.95 EPD_C5.2 85.75,20.95 84.5,20.95 | 86.75,20.95 80.15,27.55 78.6,27.55 v77.8,28.35 77.3,28.85 68.49,28.85 66.65,27.01 56.35,27.01 55.72,27.63 D6.2 55.25,27.45 45.5,27.45 v44.45,26.4 | v77,37.2 77,38.7 D3.1 | 84.5,20.95 EPD_C6.2 | 80.75,20.95 EPD_C10.2 | 164.5,50.95 164.5,51.2 J2.B12 164.25,51.45 v160.75,51.45 | 164.5,50.95 164.5,49.45 164.75,49.45 J2.MP3 165,49.2 168.75,49.2 J2.MP1 | 164.5,50.95 J2.A1 | C4_USB.2 149.25,44.95 149.25,45.95 C5_USB.2 149.5,46.2 151.25,46.2 151.75,46.7 R2-USB1.1 152,46.95 157.75,52.7 159,52.7 159.25,52.95 | 164.5,57.7 164.5,57.45 J2.B1 164.25,57.45 163.75,57.45 159.25,52.95
  Top 0.15: 164.5,57.7 164.5,59.45 164.75,59.45 J2.MP4 165,59.45 168.75,59.45 J2.MP2 | 164.5,57.7 J2.A12 | 159.25,52.95 v159.5,52.7 | 152.7,13.6 152.7,11.98 SENSOR2.7 | 152.7,13.6 153.18,12.7 154,12.7 154.75,11.95 SENSOR2.5 154.75,11.7 154.75,11.07 v154.97,10.85 | 152.7,13.6 SENSOR2.1 | J3.1 165,17.7 165,16.45 v157.25,8.7 155.25,6.7 153.2,6.7 152.61,7.29 C2.2 152.3,7.45 151.75,7.45 151.45,7.75 | R2_BAT.1 127.25,48.2 127.25,44.95 125.5,43.2 125.25,43.2 125,42.95 IC4.2 124.75,42.7 v123.75,42.7 | 131.25,39.95 130.25,38.95 122.75,38.95 122,39.7 C1_BAT1.2 | 131.25,39.95 C3.- 131.5,40.2 132.5,40.2 134.25,41.95 C1_BAT2.2 | v121.75,40.7 121.75,39.95 C1_BAT1.2 | SJ1.1 62.75,10.95 63.75,9.95 66,9.95 66.25,10.2 R2.1 66.5,10.45 68.5,12.45 69,12.45 71.25,14.7 | 76.5,11.95 73.75,14.7 71.25,14.7 | 71,14.7 68.5,14.7 R4.2 | 71,14.7 71.25,14.7 | 80,12.95 79,11.95 76.5,11.95 | 80,12.95 81,13.95 81,14.2 J1.17 | 76.5,11.95 J1.MP2 | 85.5,12.95 85.5,14.2 J1.8 | 80,12.95 85.5,12.95 | 85.5,12.95 85.55,12.95 86.45,12.05 89.9,12.05 | J1.MP1 90,11.95 89.9,12.05 | 83.25,26.7 89,20.95 EPD_C1.2 89,20.7 89.53,20.17 89.53,12.42 89.9,12.05 | 83.25,26.7 80.25,29.7 80.25,30.2 C7.2 | 90.2,38 91,37.2 119.25,37.2 121.75,39.7 C1_BAT1.2 | 90.2,38 84,44.2 84,49.95 U3.13 | 151.45,7.75 C1.2 | v120.25,43.2 120,43.2 119.5,43.7 R1_PWRUSB.1 119.7,44.03 119.7,52.51 119.69,52.52 | 151.45,7.75 151.16,8.04 150.92,8.04 131.25,27.7 131.25,39.95 | 83.25,26.7 84.86,26.7 90.84,32.69 90.84,37.28 90.2,37.93 90.2,38
  Top 0.152: 152.7,13.6 | 152.7,13.6
  Bottom 0.15: v63.5,106.95 61,106.95 59.75,108.2 53.5,108.2 | v53,108.2 53.5,108.2 | v24,106.7 v24,98.95 17.93,92.88 v7.18,92.88 | v53.5,101.95 53.5,108.2 | v30,43.95 30,43.45 | 30,43.45 v30,33.95 31,32.95 v31,28.95 41.89,28.95 v44.45,26.4 | v12.95,38.35 12.55,37.95 v8.25,37.95 7.65,37.35 7.65,35.93 2.75,31.02 v2.75,18.2 | 30,43.45 v32.25,45.7 | v77,37.2 77.8,36.4 v77.8,28.35 | v159.5,52.7 v160.75,51.45 160.75,19.95 155,14.2 155,12.95 | v157.25,8.7 157.25,10.7 155,12.95 | v121.75,40.7 122.25,41.2 | 122.25,41.2 v123.75,42.7 | 155,12.95 155,10.85 v154.97,10.85 | 122.25,41.2 v120.25,43.2
  pour Bottom: 73.76,10.56 73.78,10.58 92.52,10.58 92.54,10.56 92.56,10.54 92.58,10.52 92.58,0.53 92.93,0.18 169.93,0.18 169.92,0.18 169.92,66.82 91.98,66.82 91.96,66.84 91.94,66.86 91.92,66.88 91.92,66.92 91.94,66.94 92.02,67.03 92.02,111.03 92.02,111.02 0.18,111.02 0.28,54.93 0.33,54.88 7.32,54.88 7.34,54.86 7.36,54.84 7.38,54.82 7.38,36.08 7.36,36.06 7.24,35.94 7.22,35.92 0.18,35.92 0.18,0.23 0.23,0.18 73.72,0.18 73.54,0.36 73.52,0.38 73.52,10.32 73.54,10.34
  pour Top: 73.84,10.56 74.03,10.38 92.52,10.38 92.54,10.36 92.56,10.34 92.58,10.32 92.58,0.28 169.92,0.28 169.92,66.77 169.77,66.92 92.08,66.92 92.06,66.94 92.04,66.96 92.02,66.98 92.02,110.87 91.97,110.92 0.28,110.92 0.28,67.78 0.26,67.76 0.18,67.67 0.18,54.98 7.12,54.98 7.14,54.96 7.36,54.74 7.38,54.72 7.38,36.08 7.36,36.06 7.34,36.04 7.32,36.02 0.23,36.02 -0.02,35.77 -0.02,0.48 73.57,0.48 73.72,0.63 73.72,10.52 73.74,10.54 73.76,10.56 73.78,10.58 73.82,10.58
GPIO8
  Top 0.15: R1.2 20,34.2 20,36.7 U2.10
I2C_PW  (via drill 0.3)
  Top 0.15: R2-PINH.2 154.75,8.7 153.9,8.7 R1-PINH.2 153.65,8.7 152.55,8.7 C2.1 152.3,8.7 152.25,8.7 | 152.25,8.7 151.45,8.7 C1.1 | 152.25,8.7 152.25,10.04 | 152.25,10.04 152.25,11.7 SENSOR2.8 151.5,12.69 151.5,15.2 | 151.5,15.2 151.85,15.55 152.56,15.55 152.69,15.41 152.94,15.16 SENSOR2.2 | v24,51.95 22.75,53.2 22.75,54.2 U2.17 | v138.25,32.2 137.05,31 137.05,29.65 151.5,15.2 | SENSOR2.6 153.74,11.54 153.49,11.29 152.25,10.04
  Bottom 0.15: v24,51.95 19.75,51.95 19,52.7 19,53.2 19.5,53.7 26.75,53.7 34.5,61.45 133,61.45 138.25,56.2 v138.25,32.2
INT_RTC  (via drill 0.3)
  Top 0.15: v82.75,48.7 83.25,49.2 83.25,57.2 85,58.95 85,59.45 U3.3 85.25,59.7 v85.25,60.95 | U2.8 17.5,36.95 17.5,37.03 18.95,38.47 v33.55,38.47 | v88.25,60.95 89.25,60.95 90,60.2 R1-PINH1.1 90.23,60.26 90.92,60.96 INT_RTC.TP
  Bottom 0.15: v85.25,60.95 v88.25,60.95 | v82.75,48.7 43.78,48.7 v33.55,38.47
IO/BOOT  (via drill 0.3)
  Top 0.15: C6.1 67.5,108.2 66,108.2 BOOT_BUTTON.3 65.75,108.2 65.25,107.7 65,107.7 v64.5,107.2 | BOOT_BUTTON.4 62.25,108.2 60.75,108.2 R_BOOT.2 60.5,107.95 60.25,107.95 v59.75,107.45 | v26,54.2 25.25,54.2 U2.15
  Bottom 0.15: v26,54.2 26,73.7 58.75,106.45 | v59.75,107.45 58.75,106.45 | v64.5,107.2 63.75,106.45 58.75,106.45
IO/CHANGE  (via drill 0.3)
  Top 0.15: 47.25,108.2 47,108.2 45.75,106.95 R_CHANGE.2 | 52.75,107.45 53,107.7 53.25,107.7 53.5,107.95 53.5,108.7 51,108.7 50.75,108.45 CHANGE_BUTTON.3 | 52.75,107.45 52.25,106.95 C10.1 | v18.25,52.95 17.75,52.45 15.65,52.45 15,53.1 15,54.2 U2.23 | 52.75,107.45 v53,107.2 | 47.25,108.2 47.75,107.7 v48.5,107.7 | 47.25,108.2 CHANGE_BUTTON.4
  Bottom 0.15: v18.25,52.95 18.25,72.45 48.5,102.7 | v53,107.2 48.5,102.7 | 48.5,102.7 v48.5,107.7
MISO  (via drill 0.3)
  Top 0.15: R8.1 35,19.2 35.75,19.95 35.75,22.2 35,22.2 D12.1 33.85,22.76 33.85,28.34 31.84,30.35 30.4,30.35 v29.5,29.45 | v29.25,46.7 31,46.7 U1.2 | U2.27 10,54.2 10,53.5 v10.52,52.97 | v6.25,93.2 5.75,93.2 5.25,93.7 J4.P7 | MISO.TP 2.5,67.7 2.5,68.45 7.55,73.5 v7.55,87.4
  Bottom 0.15: v29.25,46.7 25.95,46.7 22.65,43.4 | 10.5,88.35 10.45,88.4 9.45,87.4 v7.55,87.4 | v6.25,93.2 10.5,88.95 10.5,88.35 | 10.5,52.95 10.5,88.35 | v29.5,29.45 22.65,36.3 22.65,43.4 | 22.65,43.4 22.65,44.7 20.65,46.7 17.01,46.7 12.68,51.03 12.42,51.03 10.5,52.95 | 10.5,52.95 v10.52,52.97
MOSI  (via drill 0.3)
  Top 0.15: v33.5,18.45 33,18.95 32.75,18.95 R7.1 31.5,20.2 29.5,20.2 29.5,21.7 32,21.7 32.5,22.2 D11.1 | v40.5,38.2 39.35,39.35 39.35,43.9 U1.5 | v16,33.45 16,35.58 | 16,35.58 16,36.7 U2.7 | v11.4,28.8 11.38,28.8 MOSI.TP | J1.14 82.34,14.15 82.34,13.82 81.98,13.45 v81.25,13.45 | v5.26,71.86 5.26,85.56 4.12,86.7 4.12,88.27 5.08,89.22 J4.P3 | 16,35.58 v11.43,35.58
  Bottom 0.15: v81.25,13.45 81.15,13.55 51.6,13.55 46,19.15 | 36,15.95 44.9,15.95 46,17.05 46,19.15 | v33.5,18.45 36,15.95 | v40.5,38.2 37.75,35.45 37.75,33.7 46,25.45 46,19.15 | v16,33.45 15.8,33.45 11.4,29.05 v11.4,28.8 13,28.8 25.85,15.95 36,15.95 | v5.26,71.86 5.26,60.78 9.49,56.56 9.49,42.43 13.43,38.48 13.43,37.58 v11.43,35.58
N$1  (via drill 0.3)
  Top 0.15: 122.7,43.75 122.62,43.83 D2.1 | IC4.1 122.7,43.75 | v123,40.7 123,39.95 C1_BAT1.1 | IC4.3 124.75,41.95 v123.75,41.95 123.25,41.95 123.25,43.05 123.25,43.2 122.7,43.75 | Q1.2 135.25,48.7 135.13,48.82 v134.5,48.82
  Bottom 0.15: v123,40.7 123,41.2 v123.75,41.95 124.5,41.95 131.37,48.82 v134.5,48.82
N$2
  Top 0.15: IC1.5 50.5,101.2 50.75,100.95 52,100.95 C_DELAY.1
N$3  (via drill 0.3)
  Top 0.15: v145.5,50.2 143.5,50.2 R2-USB.1 | v165.5,55.95 165.25,56.2 164.5,56.2 J2.B5
  Bottom 0.15: v145.5,50.2 152.25,50.2 158,55.95 v165.5,55.95
N$4  (via drill 0.3)
  Top 0.15: R2-USB1.2 157,53.2 v158.75,53.2 | v165.5,53.2 164.5,53.2 J2.A5
  Bottom 0.15: v165.5,53.2 v158.75,53.2
N$5  (via drill 0.3)
  Top 0.15: v129.25,48.95 126.5,48.95 123.75,51.7 R1_BAT.1 | v130.5,50.2 130.5,50.95 130.25,50.95 U5.1
  Bottom 0.15: v130.5,50.2 v129.25,48.95
N$6
  Top 0.15: CHG_LED.C 125,52.95 125,51.95 R1_BAT.2
N$7  (via drill 0.3)
  Top 0.15: C4.1 90,36.7 89.75,36.45 88.5,36.45 D4.1 88.25,36.45 v86.75,37.95 | v81.25,37.95 80.75,37.95 80.75,38.7 D3.2
  Bottom 0.15: v86.75,37.95 v81.25,37.95
N$9
  Top 0.15: R2_BAT.2 127.5,49.7 127.5,50.95 U5.5
N$10
  Top 0.15: J1.4 87.5,14.45 87.5,18.2 88.75,19.45 EPD_C1.1
N$11
  Top 0.15: J1.5 87,14.45 87,19.45 EPD_C2.1
N$18
  Top 0.15: R_CAPACITOR.1 86,61.45 86,62.95 85.75,62.95 D7.1
N$19
  Top 0.15: J1.18 80.5,14.45 80.5,15.45 84.5,19.45 EPD_C6.1
N$20
  Top 0.15: EPD_C7.1 83.25,19.45 80,16.2 J1.19
N$21
  Top 0.15: J1.20 79.5,14.45 79.5,16.95 82,19.45 EPD_C8.1
N$23
  Top 0.15: J1.22 78.5,14.45 78.5,17.2 80.75,19.45 EPD_C10.1
N$25
  Top 0.15: J1.24 77.4,14.39 77.4,17.35 79.5,19.45 EPD_C12.1
PREVGH  (via drill 0.3)
  Top 0.15: 77.75,18.95 78.25,19.45 EPD_C9.1 | 77.75,18.95 77,18.2 77,13.95 77.5,13.45 78.48,13.45 78.84,13.82 78.84,14.15 J1.21 | v84.75,27.2 84.75,32.45 D5.1 | 77.75,18.95 v78,18.7
  Bottom 0.15: v84.75,27.2 78,20.45 v78,18.7
PREVGL  (via drill 0.3)
  Top 0.15: v78,17.2 78,14.45 J1.23 | v76.5,18.7 76.5,19.45 77,19.45 EPD_C11.1 | v84.75,33.95 84.75,36.2 D4.2
  Bottom 0.15: v78,17.2 v76.5,18.7 76.5,19.7 84.75,27.95 v84.75,33.95
RESE  (via drill 0.3)
  Top 0.15: v87.5,13.45 88,13.95 88,14.2 J1.3 | v65.5,12.2 64.75,12.95 R3.1 65,13.2 65,15.45 Q3.2
  Bottom 0.15: v87.5,13.45 86,11.95 65.75,11.95 v65.5,12.2
RESE'
  Top 0.15: R3.2 66.25,12.95 66.25,11.7 R2.2 66.25,11.45 66,11.2 64.5,11.2 SJ1.2
RESET  (via drill 0.3)
  Top 0.15: R_RESET.2 21,108.45 22,108.45 RESET_BUTTON.4 22.25,108.2 v23.5,108.2 | 27.5,107.2 28,107.7 28,108.7 26,108.7 25.75,108.45 RESET_BUTTON.3 | 27.5,107.2 27.25,106.95 C5.1 | v45.5,102.95 46,102.95 47.5,101.45 IC1.1 | v41.25,107.2 27.5,107.2 | U2.3 11.25,36.95 11.25,49.95 12.64,51.34 v12.64,51.46
  Bottom 0.15: v23.5,108.2 40.25,108.2 v41.25,107.2 v45.5,102.95 14.5,71.95 14.5,53.32 v12.64,51.46
RTC_RST  (via drill 0.3)
  Top 0.15: v27.25,52.95 24.45,52.95 24,53.4 24,54.2 U2.16 | v82.5,52.95 82.5,57.7 83.75,58.95 83.75,59.45 U3.4
  Bottom 0.15: v82.5,52.95 v27.25,52.95
RX  (via drill 0.3)
  Top 0.15: v13.5,52.95 13.5,54.2 U2.24 | v13.5,65.2 15.75,67.45 RX.TP
  Bottom 0.15: v13.5,65.2 v13.5,52.95
SCK  (via drill 0.3)
  Top 0.15: v83,13.45 83,14.2 J1.13 | v50.5,33.95 39.25,45.2 U1.6 | 27.2,24 27.2,22 30,19.2 R6.1 | D10.1 30,22.2 29,22.2 27.2,24 | v3.75,91.2 4.75,91.2 5,91.45 J4.P5 | v14.75,38.25 14.75,36.95 U2.6 | v3.25,22.2 1.75,22.2 SCK.TP | 27.2,24 v26.5,24.7 26.5,27.2 29.93,30.63 38.68,30.63 v42,33.95
  Bottom 0.15: v83,13.45 82,13.45 79.75,15.7 68.75,15.7 v50.5,33.95 v42,33.95 | 14.75,38.95 14.75,47.75 9.82,52.68 9.82,84.13 6.85,87.1 6.85,88.1 v3.75,91.2 | 14.75,38.95 v14.75,38.25 3.25,26.75 v3.25,22.2 | v26.5,24.7 26.5,27.2 14.75,38.95
SCL  (via drill 0.3)
  Top 0.15: v19.5,52.95 18.75,53.7 18.75,54.2 U2.20 | v87,51.45 87,49.51 U3.16 | 156.3,14.75 154.63,14.75 SENSOR2.4 | R2-PINH.1 155,7.45 155.25,7.45 155.71,7.91 155.71,14.16 156.3,14.75 | 149.4,66.45 150.5,66.45 151.25,65.7 151.25,48.7 150.75,48.2 150.75,46.95 149,46.95 148.75,46.7 148.75,38.1 v164.15,22.7 165.25,21.6 J3.4 | U4.7 137,55.45 138.75,55.45 148.65,65.35 148.65,65.72 149.35,66.42 149.37,66.42 149.4,66.45 | v159.75,18.2 156.3,14.75 | v89.75,54.2 102,66.45 149.4,66.45
  Bottom 0.15: v19.5,52.95 26.5,52.95 27,53.45 86.3,53.45 87,52.75 v87,51.45 v89.75,54.2 | v164.15,22.7 164.15,21.1 161.25,18.2 v159.75,18.2
SDA  (via drill 0.3)
  Top 0.15: v21.75,52.45 21.31,52.45 U2.19 | U3.15 85.76,50.75 85.75,50.75 v85.75,48.95 86.25,48.45 118.75,48.45 v119,48.2 | v137.75,55.95 137,55.95 U4.8 | v137.75,30.95 153.5,15.2 153.5,14.7 SENSOR2.3 153.74,14.21 155.44,12.51 155.44,8.2 155.19,7.95 154,7.95 154,7.5 R1-PINH.1 | J3.3 165.16,19.79 164.75,20.2 v158.5,20.2
  Bottom 0.15: v21.75,52.45 82.25,52.45 v85.75,48.95 | 137.75,50.3 137.75,49.25 v137.75,30.95 148.5,20.2 v158.5,20.2 | 137.75,50.3 v137.75,55.95 | v119,48.2 130.25,48.2 131.3,49.25 136.7,49.25 137.75,50.3
SRC  (via drill 0.3)
  Top 0.15: C4.2 88.5,34.66 88.5,32.7 D5.2 88.25,32.7 87.5,33.45 v81.75,33.45 | v64.75,20.95 64.75,17.7 Q3.3 | v75.3,32.3 75.3,33.38 L1.1 76.25,33.95 78.5,33.95 v79,33.45
  Bottom 0.15: v75.3,32.3 64.75,21.75 v64.75,20.95 | v79,33.45 v81.75,33.45
SS_SD  (via drill 0.3)
  Top 0.15: 11,99.2 9.5,100.7 R10.1 | 11,99.2 13,99.2 13.75,98.45 D8.1 | 11,99.2 11,92.2 v8.5,89.7 | v12.51,50.6 12.35,50.44 U2.4 | J4.P2 6.42,87.29 v6.42,87.25
  Bottom 0.15: v12.51,50.6 12.29,50.6 10.1,52.8 10.1,84.25 7.12,87.22 7.12,88.22 5.64,89.7 | v8.5,89.7 5.64,89.7 | 5.64,89.7 4.18,91.16 4.18,91.38 3.93,91.63 3.57,91.63 3.32,91.38 3.32,91.02 3.57,90.77 3.79,90.77 6.42,88.14 v6.42,87.25
TX  (via drill 0.3)
  Top 0.15: v12.5,52.95 12.5,54.2 U2.25 | v12.5,66.2 12.5,67.45 TX.TP
  Bottom 0.15: v12.5,66.2 v12.5,52.95
USB_D+  (via drill 0.3)
  Top 0.15: v135.5,50.95 145.5,50.95 146.5,49.95 D1.1 | v32.75,36.95 25.25,36.95 U2.14
  Bottom 0.15: v135.5,50.95 91.25,50.95 87.75,47.45 62.75,47.45 62.25,47.95 43.75,47.95 v32.75,36.95
USB_D-  (via drill 0.3)
  Top 0.15: v136.25,47.95 146.5,47.95 D1.3 | U2.13 23.75,36.95 24.84,38.04 34.59,38.04 v34.75,38.2
  Bottom 0.15: v136.25,47.95 131,47.95 123.25,40.2 69.5,40.2 62.25,47.45 44,47.45 v34.75,38.2
VBAT
  Top 0.3: U4.2 134.9,55.52 134.9,55.1 U4.3 134.76,54.97 134.34,54.97 | 133.55,54.17 133.17,54.55 C2_BAT.1 133.03,54.48 131.51,52.96 130.12,52.96 U5.3 | 133.55,54.17 134.34,53.37 134.34,50.67 Q1.3 | 133.55,54.17 134.34,54.97 | VBAT.TP 146.74,65.15 143.07,65.15 134.21,56.28 134.21,55.03 134.34,54.97
VBUS
  Top 0.3: 121.71,42.61 121.26,43.05 121.26,52.54 121.74,53.03 C1_BAT.1 121.81,53.17 123.33,53.17 CHG_LED.A 123.54,53.17 123.75,53.17 124.44,53.86 126.45,53.86 127.35,52.96 U5.4 127.56,52.89 127.56,52.27 131.3,48.53 133.38,48.53 Q1.1 133.51,48.46 134.07,48.46 135.11,47.42 148.13,47.42 | 121.71,42.61 121.95,42.36 D2.2 | R1_PWRUSB.2 119.46,42.57 121.5,42.57 121.54,42.61 121.71,42.61 | 148.13,47.42 148.13,46.17 C5_USB.1 148.06,46.03 148.06,44.79 C4_USB.1 147.99,44.65 145.7,42.36 145.7,42.22 PFMF.050.1.2 | 148.13,47.42 148.13,48.25 148.82,48.94 149.16,48.94 D1.5 149.37,49.01 149.65,49.01 150.13,49.5 150.13,50.33 149.86,50.6 VBUS.TP
VRTC
  Top 0.3: C10_SUPERCAP.2 92.45,49.56 92.38,49.63 90.09,49.63 C8.1 89.76,49.69 87.5,51.95 86.53,51.95 86.49,51.99 | 86.49,51.99 86.98,52.47 86.98,60.51 87.32,60.85 87.32,61.41 R_CAPACITOR.2 | U3.14 85.11,50.19 85.11,50.61 85.6,51.1 85.61,51.1 86.49,51.99
VUSB
  Top 0.3: J2.A4 164.4,51.85 164.4,52.06 J2.B9 164.26,52.13 163.78,52.13 163.5,52.4 | J2.A9 164.4,56.91 164.4,56.63 J2.B4 164.26,56.56 163.71,56.56 163.5,56.35 163.5,52.4 | 163.5,52.4 163.36,52.33 160.31,52.33 150.2,42.22 PFMF.050.1.1